# Altium PCB CH32X315MCU-R0-1v0.PcbDoc (part 1 of 2)
Units mil, origin at the board's own origin, x right, y up, seen from the top; angles counter-clockwise.
Board outline 2755.91 x 3228.35 mil, 4 copper layers (Top Layer, Layer 1, Layer 2, Bottom Layer), stack 23.756 mil thick; 75 components, 121 nets, 391 pads, 568 vias.
Unrouted connection lines stored in the file: 7.
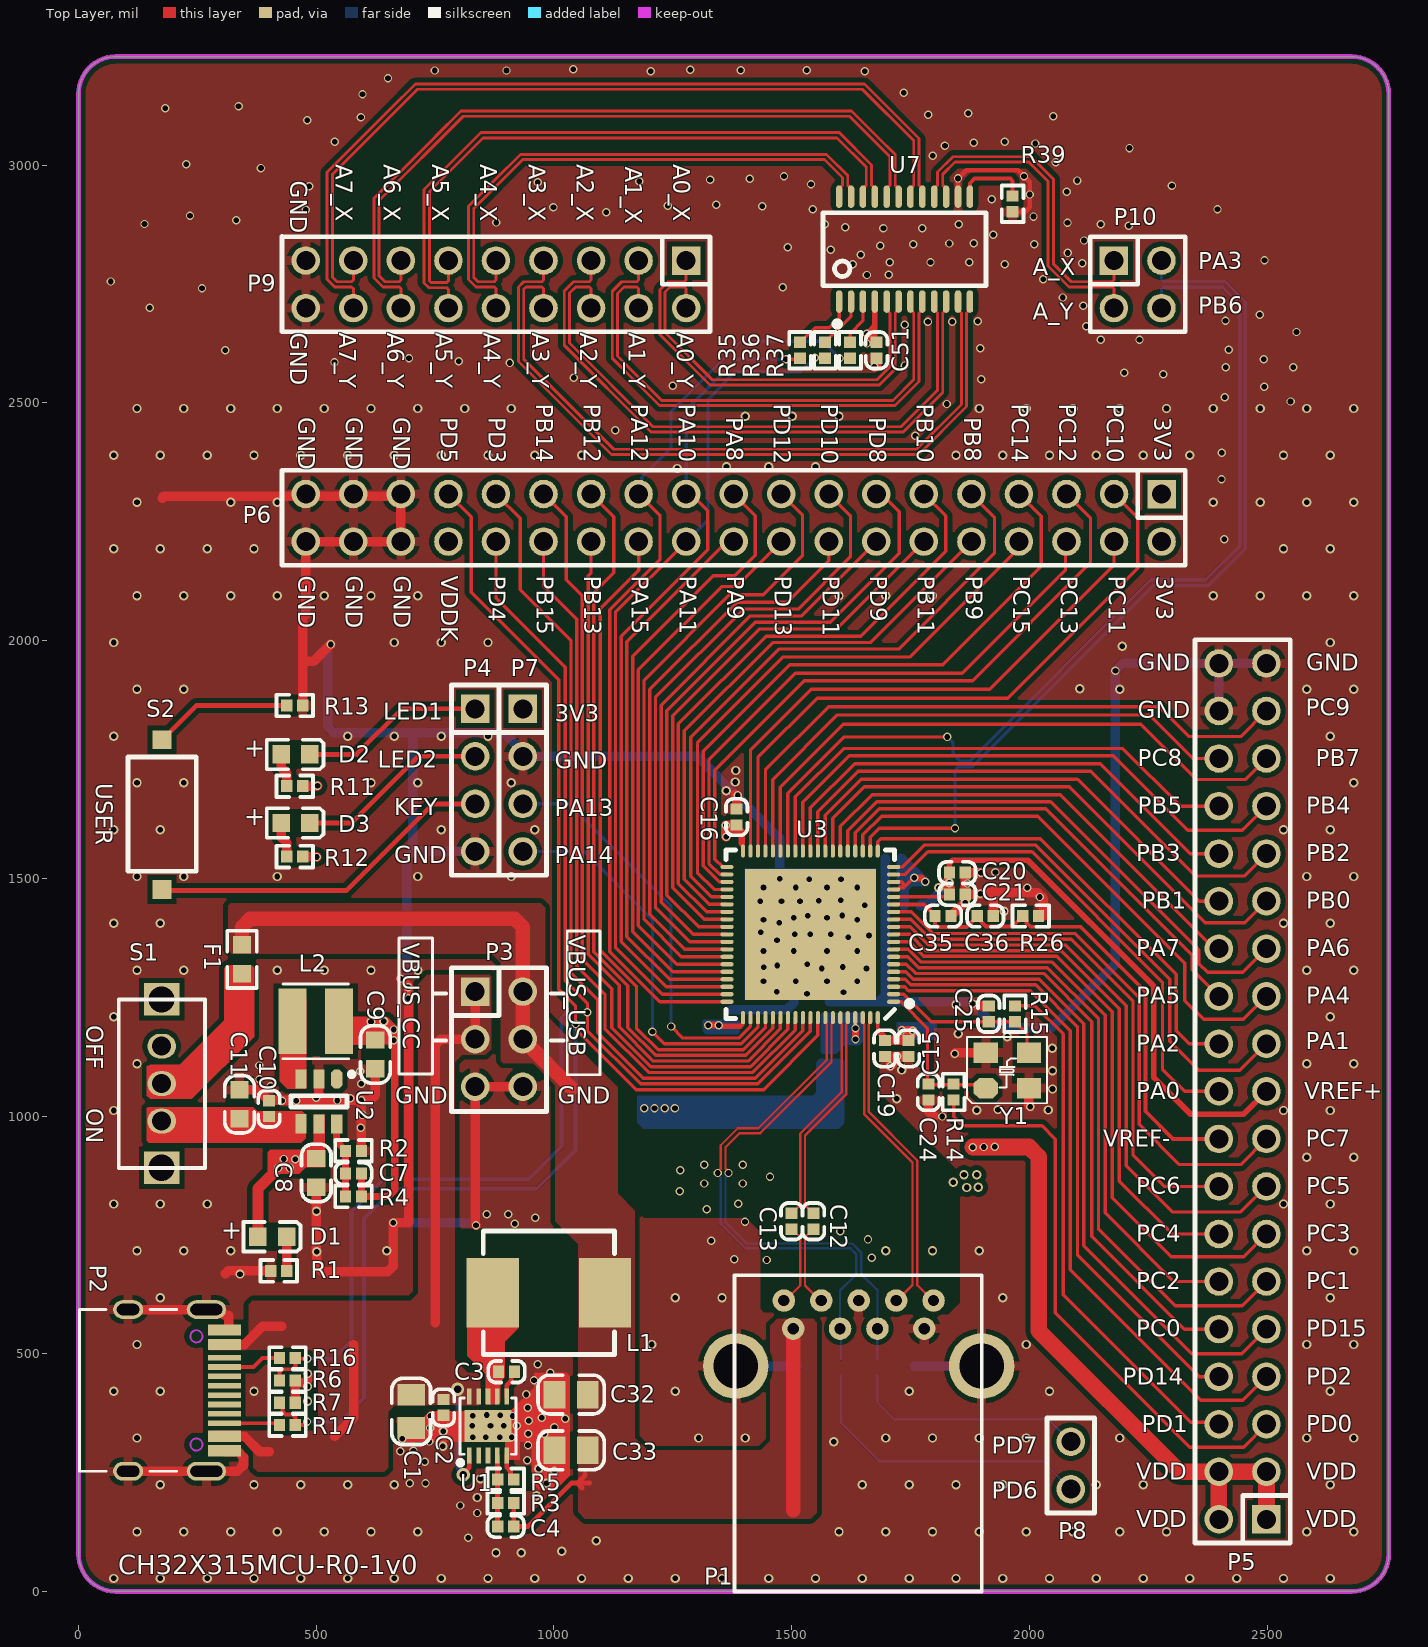
[diagram p0: Top Layer view]
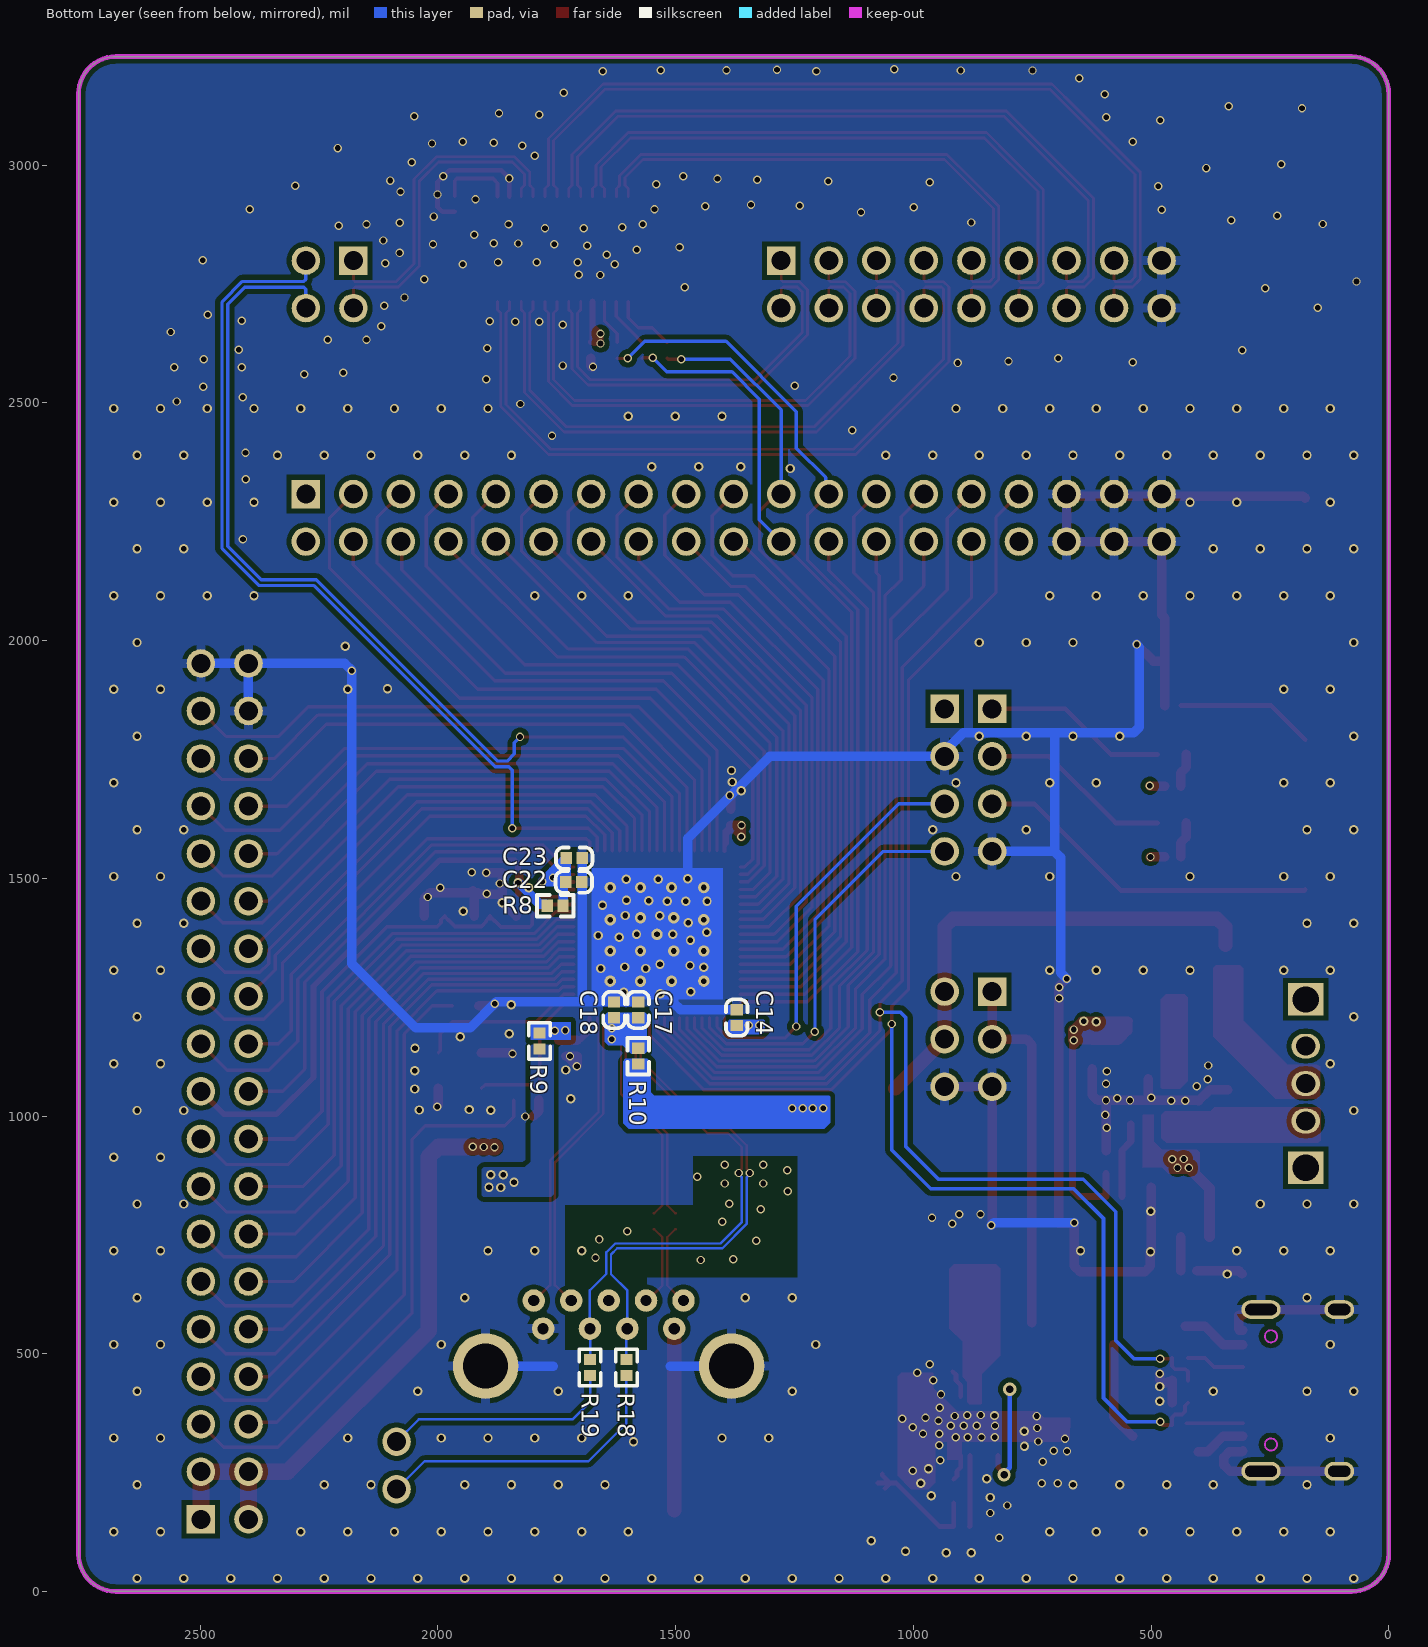
[diagram p1: Bottom Layer view, seen from below]
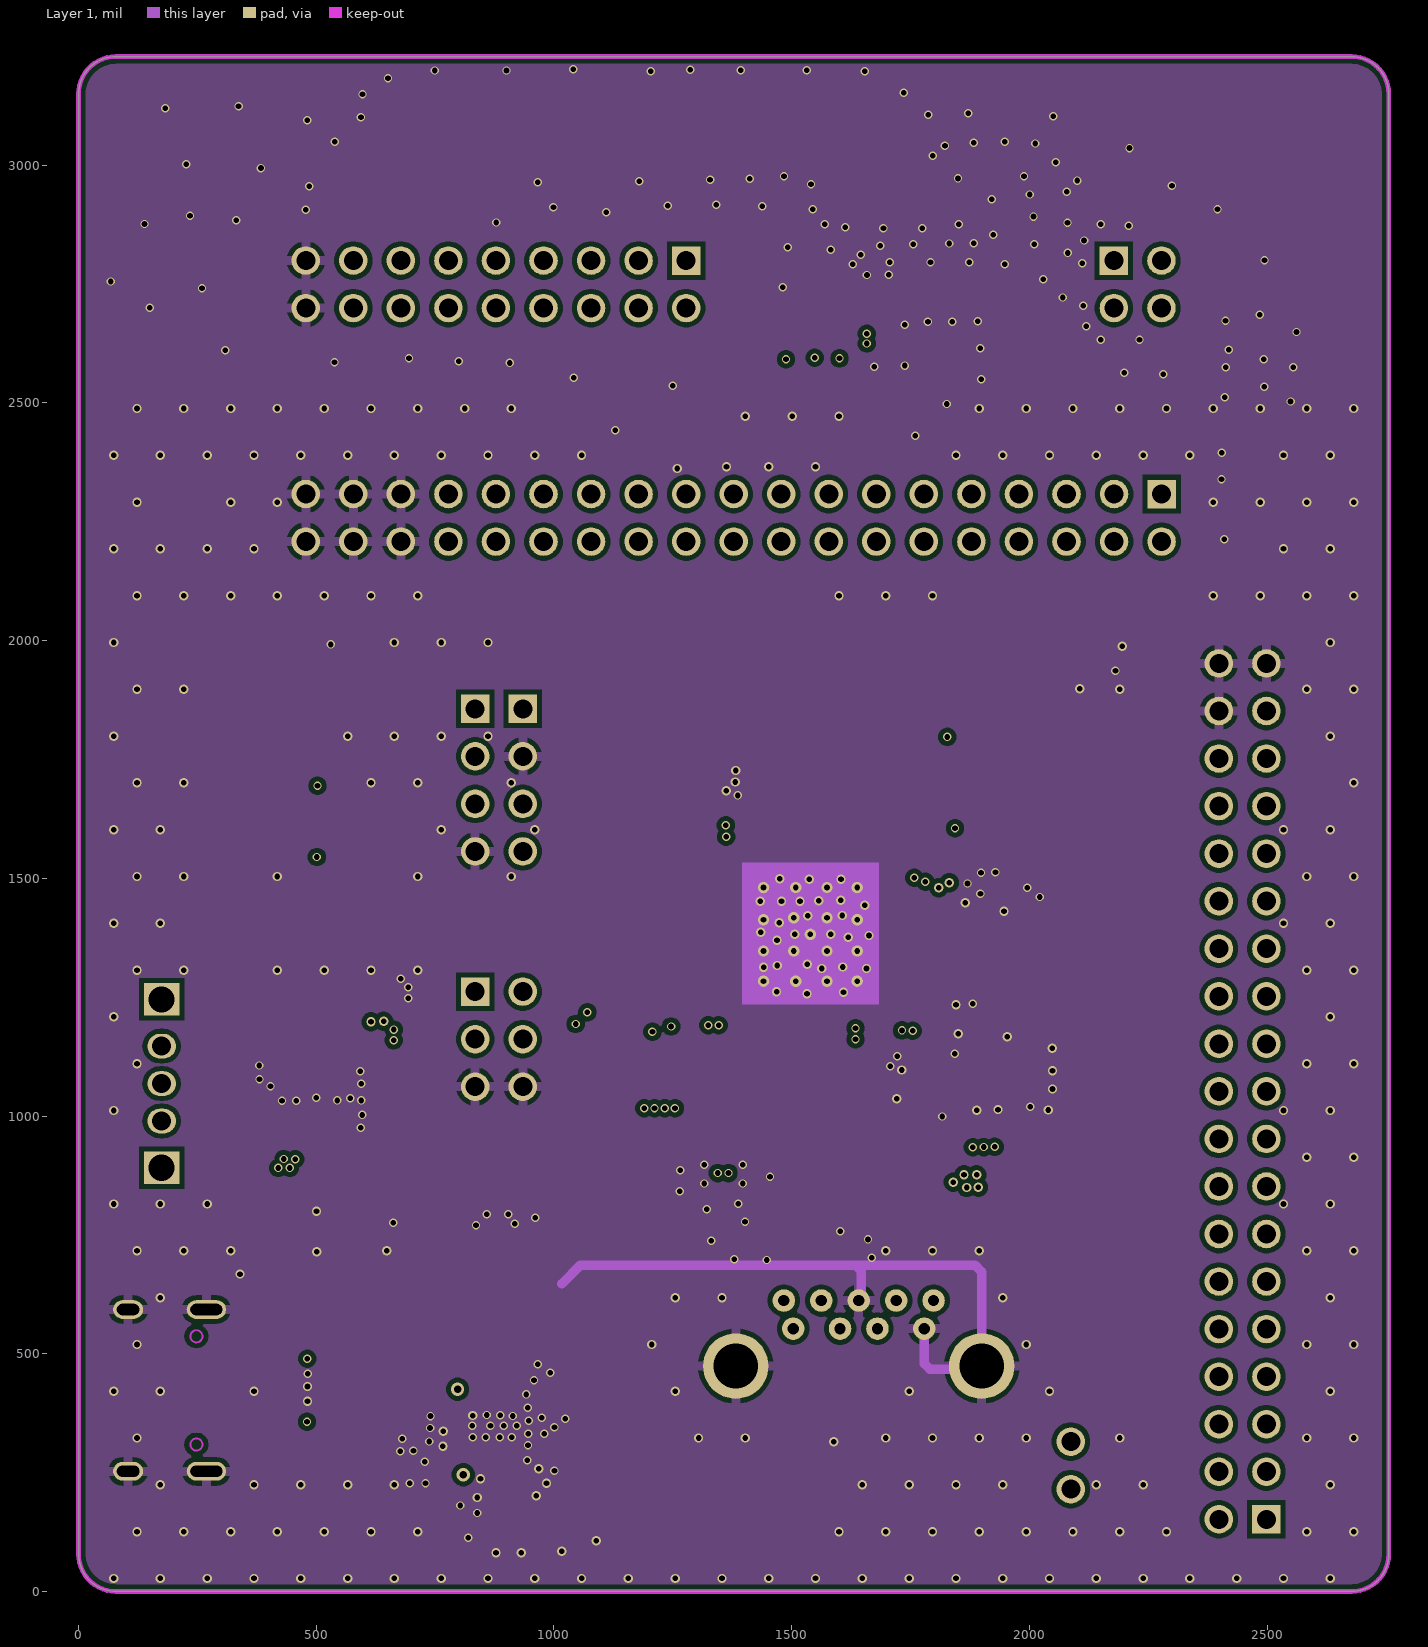
[diagram p2: Layer 1]
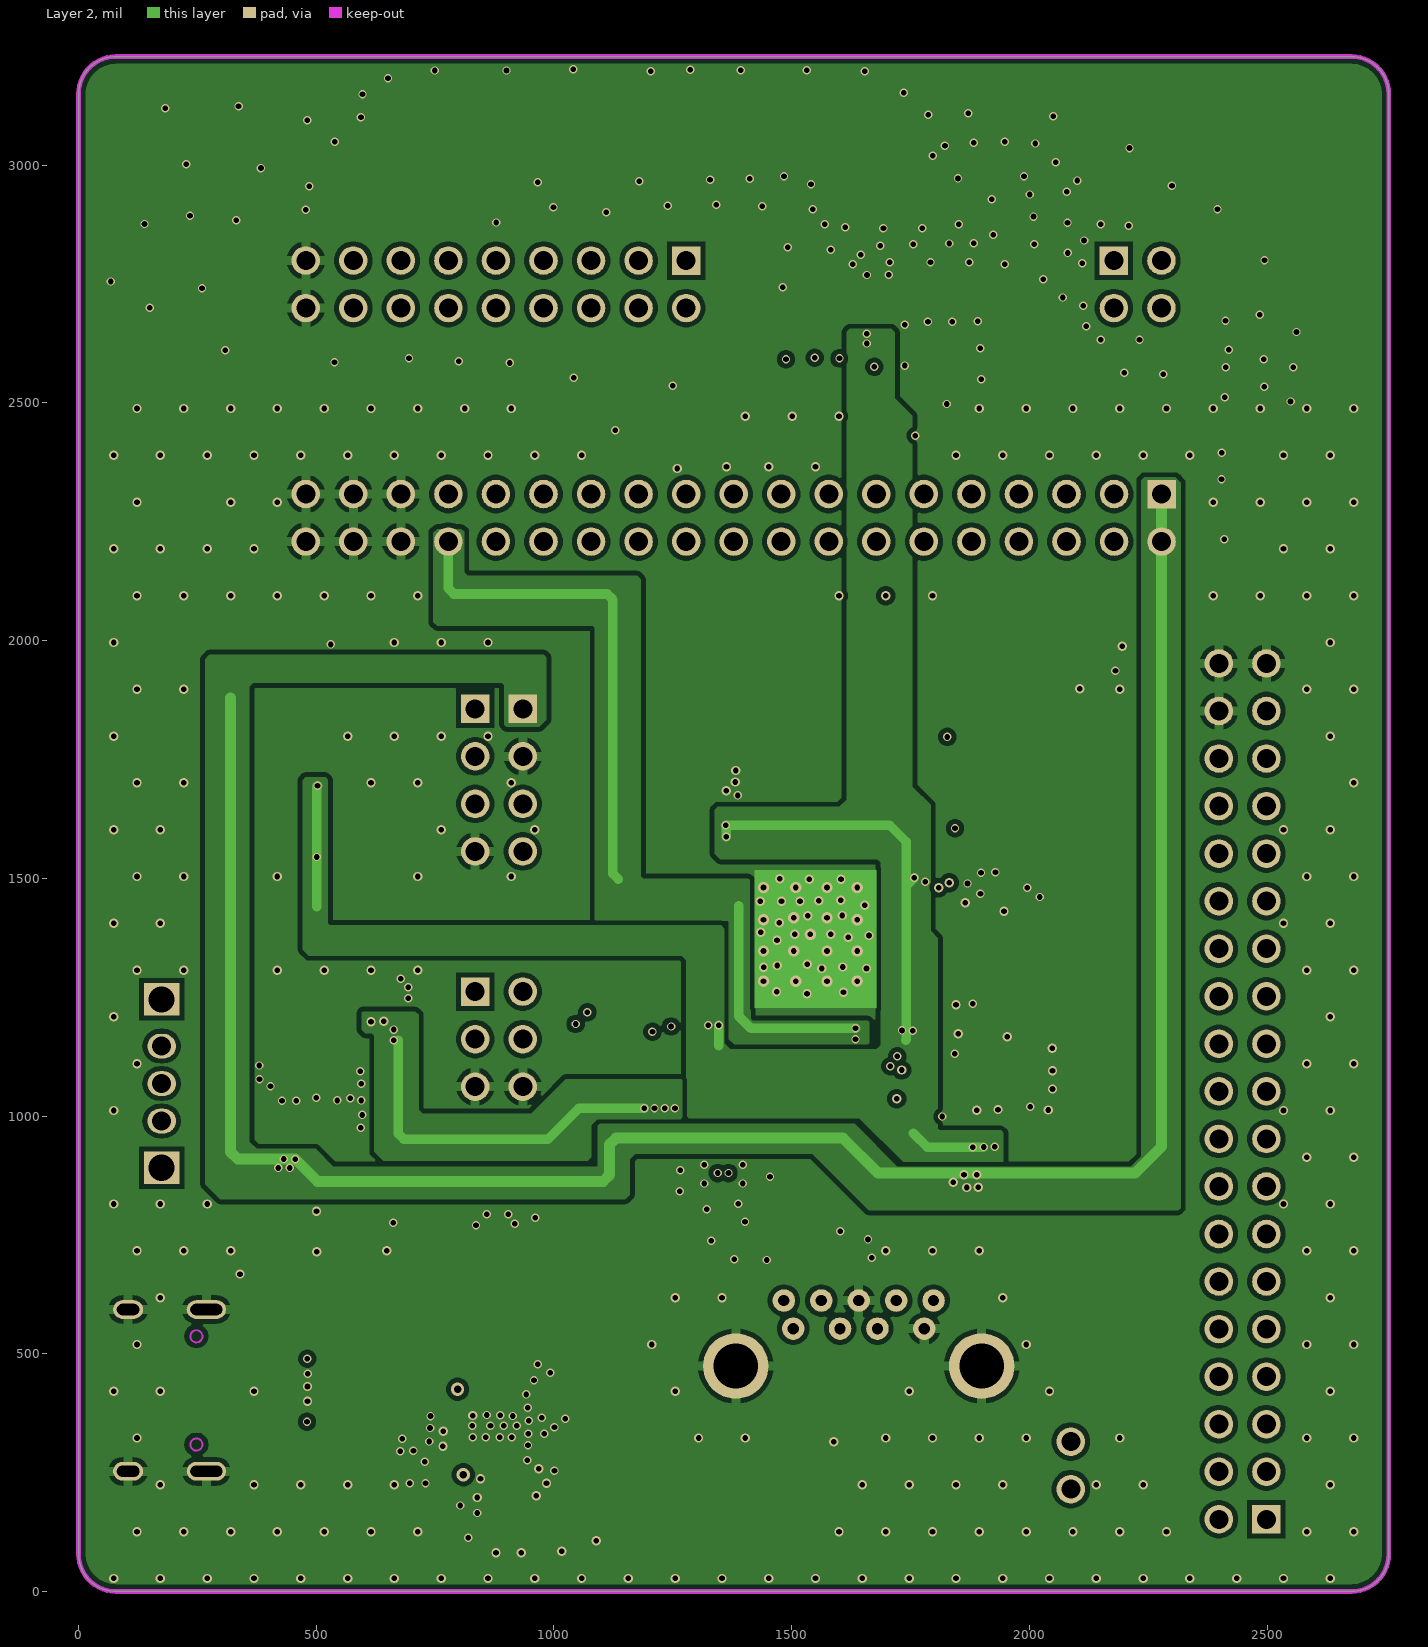
[diagram p3: Layer 2]

## Layer stack, top to bottom
Top Solder: solder mask 0.4, Solder Resist, Dk 3.5
Top Layer: signal copper 1.4
Dielectric 2: prepreg 2.8, PP-006, Dk 4.1
Layer 1: signal copper 1.378
Dielectric 1: dielectric 12.6, FR-4, Dk 4.8
Layer 2: signal copper 1.378
Dielectric 3: prepreg 2.8, PP-006, Dk 4.1
Bottom Layer: signal copper 1.4
Bottom Solder: solder mask 0.4, Solder Resist, Dk 3.5

## Board outline
0,78.74 0,3149.61 cw(c78.74,3149.61) 78.74,3228.35 2677.17,3228.35 cw(c2677.17,3149.61) 2755.91,3149.61 2755.91,78.74 cw(c2677.17,78.74) 2677.17,0 78.74,0 cw(c78.74,78.74)

## Design rules (kind name [scope] priority, off if disabled: settings)
Clearance Clearance_1 [InPolygon] p1: gap=10 ignorepadtopadclearanceinfootprint=FALSE
Clearance [All] p2: gap=5 ignorepadtopadclearanceinfootprint=FALSE except(6: Arc-THPad Arc-Via Track-THPad Track-Via Via-Fill Via-Poly Via-Region)
ComponentClearance [All] p1 off: gap=10 collisioncheckmode=3 verticalgap=10 showdistances=FALSE
DiffPairsRouting [All] p1: maxlimit=10 minlimit=5 mostfreqgap=8 toplayer_minwidth=4 toplayer_maxwidth=15 toplayer_prefwidth=8 midlayer1_minwidth=4 midlayer1_maxwidth=15 midlayer1_prefwidth=8 midlayer2_minwidth=4 midlayer2_maxwidth=15 midlayer2_prefwidth=8 bottomlayer_minwidth=4 bottomlayer_maxwidth=15 bottomlayer_prefwidth=8 maxuncoupledlength=500
HoleToHoleClearance [All] p1: gap=8 allowstackedmicrovias=TRUE
MinimumAnnularRing [All] p1: minimumring=2.76
MinimumSolderMaskSliver [All] p1 off: minsoldermaskwidth=10
PlaneConnect [All] p1: planeconnectstyle=Direct reliefexpansion=20 reliefentries=4 reliefconductorwidth=10 reliefairgap=10
PolygonConnect PolygonConnect_2 [InPolygonClass('New Class')] p1: connectstyle=Direct reliefconductorwidth=10 reliefentries=4 polygonreliefangle="90 Angle" airgapwidth=10
PolygonConnect PolygonConnect_1 [IsVia] p2: connectstyle=Direct reliefconductorwidth=10 reliefentries=4 polygonreliefangle="90 Angle" airgapwidth=10
PolygonConnect [All] p3: connectstyle=Relief reliefconductorwidth=20 reliefentries=4 polygonreliefangle="90 Angle" airgapwidth=10
RoutingVias [All] p1: holewidth=7.87 width=17.72 viastyle="Through Hole" minholewidth=5.91 minwidth=11.81 maxholewidth=28 maxwidth=50
SilkToSilkClearance [All] p1 off: silktosilkclearance=10
SilkToSolderMaskClearance [IsPad] p1 off: minsilkscreentomaskgap=10 clearancetoexposedcopper=TRUE
SolderMaskExpansion [All] p1: expansion=2 istentingtop=FALSE
Width [All] p1: maxlimit=196.85 minlimit=4 preferedwidth=5
23 further rules are at their usual default settings.

## Classes and differential pairs
polygon class "New Class": 1V2 3V3 5V VBUS_CC VDD VDDK
differential pair A7: +A7_Y -A7_X
differential pair A6: +A6_Y -A6_X
differential pair A5: +A5_Y -A5_X
differential pair A4: +A4_Y -A4_X
differential pair A3: +A3_Y -A3_X
differential pair A2: +A2_Y -A2_X
differential pair A1: +A1_X -A1_Y
differential pair A0: +A0_X -A0_Y
differential pair NewDifferentialPair2: +PA3 -PB6
differential pair A: +A_X -A_Y
differential pair PD6PD7: +USBHS_DM -USBHS_DP
differential pair SSRX: +SSRXA -SSRXB
differential pair SSTX: +SSTXA -SSTXB
differential pair NewDifferentialPair1: +NetC12_1 -NetC13_1

## Components (designator, comment, footprint, x,y, rotation, side; value= is the part's Value field where it differs from the comment)
C1 "NC(22uF/35V)" 0805_C 699.69,343.59 r90 top
C2 "NC(0.1uF)" 0402_C 767.54,370.43 r180 top
C3 "NC(100nF)" 0402_C 916.98,462.19 r270 top
C4 "NC(68pF)" 0402_C 915.2,136.81 r270 top
C7 "NC(4.7pF)" 0402_C 594.88,878.86 r270 top
C8 "10uF" 0603_C 500.13,849.96 r90 top
C9 "NC(10uF)" 0603_C 624.31,1099.16 r90 top
C10 "1uF" 0402_C 400.71,1032.25 r0 top
C11 "10uF" 0603_C 338.71,1054.93 r270 top
C12 "0.1uF" 0402_C 1545.85,761.86 r180 top
C13 "0.1uF" 0402_C 1499.85,761.86 r180 top
C14 "0.1uF" 0402_C 1371.5,1190.26 r0 bottom
C15 "4.7uF" 0402_C 1745.67,1158.89 r0 top
C16 "0.1uF" 0402_C 1384.21,1645.48 r0 top
C17 "2.2uF" 0402_C 1578.83,1206.46 r0 bottom
C18 "0.1uF" 0402_C 1629.73,1206.46 r0 bottom
C19 "0.1uF" 0402_C 1695.89,1158.89 r0 top
C20 "0.01uF" 0402_C 1831.61,1511.94 r90 top
C21 "1uF" 0402_C 1831.61,1466.13 r90 top
C22 "0.1uF" 0402_C 1731,1492.27 r90 bottom
C23 "0.1uF" 0402_C 1730.11,1542.33 r90 bottom
C24 "20pF" 0402_C 1787.67,1067.13 r0 top
C25 "20pF" 0402_C 1914.27,1198.18 r180 top
C32 "NC(22uF)" 0805_C 1000.96,414.14 r0 top
C33 "NC(22uF)" 0805_C 1000.96,296.9 r0 top
C35 "NC(0.01uF)" 0402_C 1801.61,1420.48 r90 top
C36 "NC(1uF)" 0402_C 1890.43,1420.48 r90 top
C51 "1uF" 0402_C 1678.57,2627.22 r0 top
D1 "RED" 0603+ 377.27,746.15 r0 top
D2 "BLUE" 0603+ 426.05,1760.53 r0 top
D3 "RED" 0603+ 426.05,1616.37 r0 top
F1 "1A" 0603 343.66,1359.79 r270 top
L1 "NC(4.7uH/5A)" IND-SMD_L7.0-W6.6 989.27,628.27 r0 top
L2 "NC(2.2uH)" CD32 499.04,1199.1 r0 top
P1 "USB3.0-A" USB3.0-A-Receptacle 1503.17,552.8 r0 top
P2 "TYPE-C" TYPE-C-Receptacle-2.0 307.04,422.88 r270 top
P3 "HEADER 3x2" IDC6-2.54mm 834.34,1261.66 r270 top
P4 "HEADER 4" SIP4-2.54mm 834.34,1856.48 r0 top
P5 "HEADER 19x2" IDC38-2.54MM 2498.45,151.84 r180 top
P6 "HEADER 19x2" IDC38-2.54MM 2277.95,2308.21 r270 top
P7 "HEADER 4" SIP4-2.54mm 934.34,1856.48 r0 top
P8 "HEADER 2" SIP2-2.54mm 2087.05,215.09 r0 top
P9 "HEADER 9x2" IDC18-2.54MM 1277.95,2799.25 r270 top
P10 "Header 2X2" IDC4-2.54mm 2177.69,2799.25 r0 top
R1 "1K" 0402 437.85,674.29 r180 top
R2 "NC(200k)" 0402 561.41,926.73 r0 top
R3 "NC(15k)" 0402 881.74,186.31 r0 top
R4 "NC(200k)" 0402 594.88,830.99 r180 top
R5 "NC(4.7k)" 0402 915.2,235.8 r180 top
R6 "NC(5.1K)" 0402 422.56,443.87 r0 top
R7 "NC(5.1K)" 0402 422.56,396.87 r0 top
R8 "0R" 0402 1736.77,1442.33 r0 bottom
R9 "0R" 0402 1786.44,1141.05 r90 bottom
R10 "NC(0R)" 0402 1578.83,1142.59 r270 bottom
R11 "1K" 0402 471.34,1693.78 r180 top
R12 "1K" 0402 471.34,1545.55 r180 top
R13 "10K" 0402 471.34,1863.32 r180 top
R14 "NC(0Ω)" 0402 1840.52,1033.67 r90 top
R15 "NC(0Ω)" 0402 1969.53,1231.65 r270 top
R16 "NC(0Ω)" 0402 422.56,490.87 r0 top
R17 "NC(0Ω)" 0402 422.56,349.87 r0 top
R18 "NC(0Ω)" 0402 1603.63,487.87 r270 bottom
R19 "NC(0Ω)" 0402 1679.94,487.87 r270 bottom
R26 "0R" 0402 2019.23,1420.48 r180 top
R35 "NC(0Ω)" 0402 1517.47,2627.22 r270 top
R36 "NC(0Ω)" 0402 1570.17,2627.22 r270 top
R37 "NC(0Ω)" 0402 1622.87,2627.22 r270 top
R39 "0Ω" 0402 1964.62,2901.77 r90 top
S1 "SW SPDT" SW1 174.75,1068.18 r90 top
S2 "KEY" SMD_6.1x3.65x2.5mm-KEY 175.65,1476.46 r90 top
U1 "NC(CH2024Q)" DFN10_3X3 861.16,347.74 r0 top
U2 "CH2003K" SOT-23-6 542.95,1077.88 r180 top
U3 "CH32X315MCU" QFN76_9X9 1539.19,1382.09 r90 top
U7 "CH448U" QSOP24 1599.76,2712.97 r0 top
Y1 "20M" XT3225 1908.41,1058.44 r0 top

## Footprints (in the part's own frame and the unit in brackets; to place one, negate y for a bottom-side part, rotate by r counter-clockwise, add the part's x,y. Pads: shape width x height; smd on the part's side, far side on the other; paste and mask are expansions set on the pad)
0402 [mm]
  rect 0.6x0.65 smd mask+0.051: 1(0,0) 2(0.85,0)
  silkscreen extent -0.55,-0.58 1.4,0.57
0402_C [mm]
  rect 0.65x0.6 smd mask+0.051: 1(0,0) 2(0,-0.85)
  silkscreen extent -0.58,-1.4 0.57,0.55
0603 [mm]
  rect 0.93x0.98 smd: 1(0,0) 2(1.54,0)
  silkscreen extent -0.76,-0.79 2.3,0.79
0603+ [mm]
  rect 0.93x0.98 smd: 1(0,0) 2(1.54,0)
  silkscreen extent -0.76,-0.79 2.27,0.79
0603_C [mm]
  rect 0.93x0.98 smd mask+0.051: 1(0,0) 2(1.54,0)
  silkscreen extent -0.76,-0.79 2.31,0.79
0805_C [mm]
  rect 1.16x1.47 smd mask+0.051: 1(0,0) 2(1.78,0)
  silkscreen extent -0.88,-1.04 2.66,1.03
CD32 [mm]
  rect 1.5x3.5 smd: 1(-1.25,0) 2(1.25,0)
  silkscreen extent -1.75,-2 1.75,2
DFN10_3X3 [mm]
  rect 2.5x1.7 smd mask+0.051: 0(0,0)
  rect 0.25x0.85 smd mask+0.051: 1(-1,-1.575) 2(-0.5,-1.575) 3(0,-1.575) 4(0.5,-1.575) 5(1,-1.575) 6(1,1.575) 7(0.5,1.575) 8(0,1.575) 9(-0.5,1.575) 10(-1,1.575)
  silkscreen extent -1.57,-2.05 1.5,1.5
IDC4-2.54mm [mil]
  rect 60x60 hole 40: 1(0,0)
  round 60 hole 40: 2(100,0) 3(0,-100) 4(100,-100)
  silkscreen extent -50,-150 150,50
IDC6-2.54mm [mil]
  rect 60x60 hole 40: 1(0,0)
  round 60 hole 40: 2(0,100) 3(100,0) 4(100,100) 5(200,0) 6(200,100)
  silkscreen extent -50,-50 252,150
IDC18-2.54MM [mil]
  rect 60x60 hole 40: 1(0,0)
  round 60 hole 40: 2(100,0) 3(0,-100) 4(100,-100) 5(0,-200) 6(100,-200) 7(0,-300) 8(100,-300) 9(0,-400) 10(100,-400) 11(0,-500) 12(100,-500) 13(0,-600) 14(100,-600) 15(0,-700) 16(100,-700) 17(0,-800) 18(100,-800)
  silkscreen extent -51,-850 150,50
IDC38-2.54MM [mil]
  rect 60x60 hole 40: 1(0,0)
  round 60 hole 40: 2(100,0) 3(0,-100) 4(100,-100) 5(0,-200) 6(100,-200) 7(0,-300) 8(100,-300) 9(0,-400) 10(100,-400) 11(0,-500) 12(100,-500) 13(0,-600) 14(100,-600) 15(0,-700) 16(100,-700) 17(0,-800) 18(100,-800) 19(0,-900) 20(100,-900) 21(0,-1000) 22(100,-1000) 23(0,-1100) 24(100,-1100) 25(0,-1200) 26(100,-1200) 27(0,-1300) 28(100,-1300) 29(0,-1400) 30(100,-1400) 31(0,-1500) 32(100,-1500) 33(0,-1600) 34(100,-1600) 35(0,-1700) 36(100,-1700) 37(0,-1800) 38(100,-1800)
  silkscreen extent -50,-1850 150,50
IND-SMD_L7.0-W6.6 [mm]
  rect 2.8x3.7 smd: 1(-3,0) 2(3,0)
  silkscreen extent -3.5,-3.3 3.5,3.3
QFN76_9X9 [mm]
  round 0.61 hole 0.305 mask+0.051: 0(-2.5,-2.5) 0(-2.5,2.5) 0(0,0) 0(2.5,-2.5) 0(2.5,2.5)
  rect 7x7 smd mask+0.051: 0(0,0)
  oval 0.22x0.7 smd mask+0.051: 1(-3.6,-4.45) 2(-3.2,-4.45) 3(-2.8,-4.45) 4(-2.4,-4.45) 5(-2,-4.45) 6(-1.6,-4.45) 7(-1.2,-4.45) 8(-0.8,-4.45) 9(-0.4,-4.45) 10(0,-4.45) 11(0.4,-4.45) 12(0.8,-4.45) 13(1.2,-4.45) 14(1.6,-4.45) 15(2,-4.45) 16(2.4,-4.45) 17(2.8,-4.45) 18(3.2,-4.45) 19(3.6,-4.45) 39(3.6,4.45) 40(3.2,4.45) 41(2.8,4.45) 42(2.4,4.45) 43(2,4.45) 44(1.6,4.45) 45(1.2,4.45) 46(0.8,4.45) 47(0.4,4.45) 48(0,4.45) 49(-0.4,4.45) 50(-0.8,4.45) 51(-1.2,4.45) 52(-1.6,4.45) 53(-2,4.45) 54(-2.4,4.45) 55(-2.8,4.45) 56(-3.2,4.45) 57(-3.6,4.45)
  oval 0.7x0.22 smd mask+0.051: 20(4.45,-3.6) 21(4.45,-3.2) 22(4.45,-2.8) 23(4.45,-2.4) 24(4.45,-2) 25(4.45,-1.6) 26(4.45,-1.2) 27(4.45,-0.8) 28(4.45,-0.4) 29(4.45,0) 30(4.45,0.4) 31(4.45,0.8) 32(4.45,1.2) 33(4.45,1.6) 34(4.45,2) 35(4.45,2.4) 36(4.45,2.8) 37(4.45,3.2) 38(4.45,3.6) 58(-4.45,3.6) 59(-4.45,3.2) 60(-4.45,2.8) 61(-4.45,2.4) 62(-4.45,2) 63(-4.45,1.6) 64(-4.45,1.2) 65(-4.45,0.8) 66(-4.45,0.4) 67(-4.45,0) 68(-4.45,-0.4) 69(-4.45,-0.8) 70(-4.45,-1.2) 71(-4.45,-1.6) 72(-4.45,-2) 73(-4.45,-2.4) 74(-4.45,-2.8) 75(-4.45,-3.2) 76(-4.45,-3.6)
  silkscreen extent -4.5,-5.45 4.5,4.5
QSOP24 [mm]
  oval 0.35x1.2 smd mask+0.051: 1(0,0) 2(0.635,0) 3(1.27,0) 4(1.905,0) 5(2.54,0) 6(3.175,0) 7(3.81,0) 8(4.445,0) 9(5.08,0) 10(5.715,0) 11(6.35,0) 12(6.985,0) 13(6.985,5.6) 14(6.35,5.6) 15(5.715,5.6) 16(5.08,5.6) 17(4.445,5.6) 18(3.81,5.6) 19(3.175,5.6) 20(2.54,5.6) 21(1.905,5.6) 22(1.27,5.6) 23(0.635,5.6) 24(0,5.6)
  silkscreen extent -0.86,-1.35 7.84,4.75
SIP2-2.54mm [mil]
  round 60 hole 40: 1(0,0) 2(0,100)
  silkscreen extent -50,-50 50,150
SIP4-2.54mm [mil]
  rect 60x60 hole 40: 1(0,0)
  round 60 hole 40: 2(0,-100) 3(0,-200) 4(0,-300)
  silkscreen extent -50,-350 50,50
SMD_6.1x3.65x2.5mm-KEY [mm]
  rect 1x1 smd: 1(0,0) 2(8,0)
  silkscreen extent 0.98,-1.83 7.08,1.83
SOT-23-6 [mm] "SOT-23-6"
  oct 0.6x1 smd: 1(0,0)
  rect 0.6x1 smd: 2(0.95,0) 3(1.9,0) 5(0.95,2.4) 6(0,2.4)
  rect 0.6x1.04 smd: 4(1.9,2.4)
  silkscreen extent -0.93,-0.38 2.45,1.49
SW1 [mm]
  rect 1.75x1.9 hole 1.4: 0(-4.5,0) 0(4.5,0)
  oval 1.321x1.524 hole 1.016: 1(0,0) 2(-2,0) 3(2,0)
  silkscreen extent -4.51,-2.31 4.5,2.29
TYPE-C-Receptacle-2.0 [mm]
  oval 1x2.1 hole 0.6 slot 1.7 at 90 deg: 0(-4.32,-0.97) 0(4.32,-0.97)
  oval 1x1.6 hole 0.6 slot 1.2 at 90 deg: 0(-4.32,-5.15) 0(4.32,-5.15)
  rect 0.6x1.75 smd mask+0.051: A1(-3.225,0) A4(-2.45,0) B1(3.225,0) B4(2.45,0)
  rect 0.3x1.75 smd mask+0.051: A5(-1.25,0) A6(-0.25,0) A7(0.25,0) A8(1.25,0) B5(1.75,0) B6(0.75,0) B7(-0.75,0) B8(-1.75,0)
  Keep-Out Layer circle w0.1: c-2.89,-1.5 r0.325
  Keep-Out Layer circle w0.1: c2.89,-1.5 r0.325
  silkscreen extent -4.32,-7.75 4.32,-2.55
USB3.0-A-Receptacle [mm]
  round 3.5 hole 2.4: 0(-3.07,-2) 0(10.07,-2)
  round 1.2 hole 0.6: 1(0,0) 2(2.5,0) 3(4.5,0) 4(7,0) 5(7.5,1.5) 6(5.5,1.5) 7(3.5,1.5) 8(1.5,1.5) 9(-0.5,1.5)
  silkscreen extent -3.14,-14.04 10.07,2.85
XT3225 [mm]
  oct 1.3x1.1 smd: 1(0,0)
  rect 1.3x1.1 smd: 2(2.3,0) 3(2.3,1.9) 4(0,1.9)
  silkscreen extent -1.02,-0.8 3.27,2.74

## Part data
C1 C4 C32 C33: library part "0603 100nF (104) 10% 50V", "贴片电容", Package=0603, SuppliersPartNumber=C14663, ComponentLink1Description=供应商链接, ComponentLink1URL=http://www.szlcsc.com/product/details_15331.html, Supplier=LC
C2 C7 C8 C9 C10 C11 C12 C13 C14 C15 C16 C17 C18 C19 C20 C21 C22 C23 C35 C36 C51: library part CAP, "Capacitor"
C3: library part "0603 1uF (105) 10% 50V", "贴片电容", Package=0603, SuppliersPartNumber=C15849, ComponentLink1Description=供应商链接, ComponentLink1URL=http://www.szlcsc.com/product/details_16531.html, Supplier=LC
C24 C25: library part Cap, "Capacitor"
D1 D2 D3: library part LED0, "Typical INFRARED GaAs LED", LatestRevisionDate=08-Jul-2005, LatestRevisionNote="Mech Layer 1 removed.", PackageDescription="LED; 2 Leads", PackageReference=LED-0, Published=8-Jun-2000, Publisher="Altium Limited"
F1: library part FUSE1, "Fuse"
L1 L2: library part INDUCTOR
P2: library part TYPE-C1
P3: "Header, 3-Pin, Dual row"
P4 P7: "Header, 4-Pin"
P5 P6: "Header, 19-Pin, Dual row"
P8: "Header, 2-Pin"
P9: "Header, 9-Pin, Dual row"
P10: "Header, 2-Pin, Dual row", LatestRevisionDate=17-Jul-2002, LatestRevisionNote="Re-released for DXP Platform.", Publisher="Altium Limited"
R1 R2 R3 R4 R5 R11 R12 R13 R14 R15 R35 R36 R37 R39: library part RES
R6 R7 R16 R17 R18 R19: library part Res2, "Resistor"
R8 R9 R10 R26: library part R
S2: library part KEY1
U1: library part CH2024Q, "Step-Down DC-DC Converter, 28V input, FB 1.2V, 3A output"
U2: "Step-Down DC-DC Converter, 5V input, FB 0.6V, 800mA output, with LDO 3.3V * 200mA"
U3: "RISC-V FPU MCU, 480MHz, USB3.0_5Gbps, PD, HSADC"
U7: "USB2.0 mux 8:1 / 16:1 Differential Switch, DPOT with dual enable"
Y1: library part XTAL, "Crystal Oscillator", LatestRevisionDate=17-Jul-2002, LatestRevisionNote="Re-released for DXP Platform.", PackageReference=R38, Published=8-Jun-2000, Publisher="Altium Limited"

## Via types
v1: diameter 19.68, hole 11.81, Top Layer to Bottom Layer, tented both sides, 297 vias
v2: diameter 17.72, hole 11.81, Top Layer to Bottom Layer, tented both sides, 257 vias
v3: diameter 23.62, hole 11.81, Top Layer to Bottom Layer, tented both sides, 8 vias
v4: diameter 23.62, hole 11.81, Top Layer to Bottom Layer, 4 vias
v5: diameter 27.56, hole 15.75, Top Layer to Bottom Layer, tented both sides, 2 vias

## Nets (pads, with @x,y where several pads share a name; then routed paths per layer and width w, separated by ;. In a path a pad name is that pad's centre, name@x,y a point inside that pad or via, vN(x,y) a via of type N, cw(c..) or ccw(c..) an arc to the next point about the centre after c; other vN are vias at no path point)
1V2: C7.1 C9.2 L2.2 R4.1 R10.2 | length 2191.3
  Top Layer w15: C7.1@594.88,878.86 R4.1@594.88,830.99 651.22,830.99 665.21,844.97 665.21,1144.46 ; v2@657.67,1152.01 665.21,1144.46 ; v2@664.69,1159.03 665.21,1158.51 665.21,1144.46
  Top Layer w20: L2.2@548.26,1199.1 L2.2@549.26,1199.1 ; C9.2@625.31,1159.79 C9.2@624.31,1159.79 568.78,1159.79 549.26,1179.32 L2.2@549.26,1189.96 ; C9.2@629.66,1159.95 663.77,1159.95 664.69,1159.03 664.69,1170.44 ; L2.2@549.26,1189.96 L2.2@549.26,1199.1 ; L2.2@549.26,1189.96 568.78,1170.44 664.69,1170.44 ; L2.2@549.26,1199.1 645.43,1199.1 v2(662.69,1181.84) ; L2.2@549.26,1199.1 566.51,1181.84 v2(662.69,1181.84) ; v2(662.69,1181.84) 664.69,1181.84 664.69,1170.44
  Layer 2 w20: 672.69,1159.03 672.69,962.81 684.41,951.1 987.26,951.1 1052.36,1016.19 v2@1189.84,1016.19
  Bottom Layer w20: v2@1189.84,1016.19 1553.98,1016.19 1578.83,1041.05 R10.2@1578.83,1109.12
  other v1: 615.2,1197.91 641.62,1198.99
  other v2: 1189.84,1016.49 1211.37,1016.49 1232.9,1016.49 1254.43,1016.49 662.69,1159.03
3V3: C8.2 D1.1 P6.1 P6.2 P7.1 R9.1 U2.5 | length 4726.7
  Top Layer w23: D1.1@377.27,746.15 377.27,847.64 v2(420.4,890.77) ; v2(455.76,909.19) 498.74,909.19 C8.2@500.13,910.59 ; C8.2@505.55,903.55 U2.5@505.55,983.39
  Layer 2 w23: 319.48,1878.91 319.48,924.54 334.83,909.19 431.69,909.19 v2(455.76,909.19) 502.28,862.67 1103.58,862.67 1117.05,876.15 1117.05,939.83 1130.53,953.3 1608.21,953.3 1681.53,879.98 2222.46,879.98 2277.95,935.47 P6.2@2277.95,2208.21 P6.1@2277.95,2308.21
  other v1: 1868.07,849.55 1892.61,850.03 1839.95,860.99 1862.35,876.24 1888.8,876.24
  other v2: 444.48,890.77 431.69,909.57
+5V: C10.2 C11.2 S1.2 U2.4 | length 281.2
  Top Layer w30: S1.2@174.75,989.44 332.86,989.44 334.42,990.99 C11.2@338.71,990.99 ; C11.2@338.71,983.62 455.31,983.62
A0_X: P9.1 U7.6 | length 896.4
  Top Layer w6: P9.1@1277.95,2799.25 1277.95,2758.27 1274.44,2754.75 1239.58,2754.75 1222.81,2737.99 1222.81,2643.26 1328.38,2537.69 1409.6,2537.69 1684.16,2537.69 1717.76,2571.29 1717.76,2688.83 1724.76,2695.83 U7.6@1724.76,2712.97
A0_Y: P9.2 U7.5 | length 841.7
  Top Layer w6: P9.2@1277.95,2699.25 1277.95,2740.24 1274.44,2743.75 1244.13,2743.75 1233.81,2733.43 1233.81,2647.82 1332.94,2548.69 1679.61,2548.69 1706.76,2575.84 1706.76,2688.83 1699.76,2695.83 U7.5@1699.76,2712.97
A1_X: P9.3 U7.8 | length 1126
  Top Layer w6: P9.3@1177.95,2799.25 1177.95,2758.27 1174.44,2754.75 1142.52,2754.75 1122.51,2734.74 1122.51,2593.63 1163.1,2553.03 1222.01,2494.13 1336.77,2494.13 1717.37,2494.13 1767.76,2544.52 1767.76,2688.83 1774.76,2695.83 U7.8@1774.76,2712.97
A1_Y: P9.4 U7.7 | length 1071.3
  Top Layer w6: P9.4@1177.95,2699.25 1177.95,2740.24 1174.44,2743.75 1147.08,2743.75 1133.51,2730.18 1133.51,2598.18 1174.62,2557.07 1226.56,2505.13 1712.81,2505.13 1756.76,2549.07 1756.76,2688.83 1749.76,2695.83 U7.7@1749.76,2712.97
A2_X: P9.5 U7.10 | length 1321.1
  Top Layer w6: P9.5@1077.95,2799.25 1077.95,2758.27 1074.44,2754.75 1041.21,2754.75 1021.67,2735.21 1021.67,2621.01 1203.94,2438.74 1734.73,2438.74 1817.76,2521.77 1817.76,2688.83 1824.76,2695.83 U7.10@1824.76,2712.97
A2_Y: P9.6 U7.9 | length 1266.4
  Top Layer w6: P9.6@1077.95,2699.25 1077.95,2740.24 1074.44,2743.75 1045.76,2743.75 1032.67,2730.66 1032.67,2625.57 1208.49,2449.74 1730.17,2449.74 1806.76,2526.33 1806.76,2688.83 1799.76,2695.83 U7.9@1799.76,2712.97
A3_X: P9.7 U7.12 | length 1545.1
  Top Layer w6: P9.7@977.95,2799.25 977.95,2758.27 974.44,2754.75 936.33,2754.75 925.37,2743.8 925.37,2587.24 1121.13,2391.49 1767.26,2391.49 1867.76,2491.99 1867.76,2688.83 1874.76,2695.83 U7.12@1874.76,2712.97
A3_Y: P9.8 U7.11 | length 1490.4
  Top Layer w6: P9.8@977.95,2699.25 977.95,2740.24 974.44,2743.75 940.88,2743.75 936.37,2739.24 936.37,2591.8 1125.69,2402.49 1762.7,2402.49 1856.76,2496.54 1856.76,2688.83 1849.76,2695.83 U7.11@1849.76,2712.97
A4_X: P9.9 U7.24 | length 1114.8
  Top Layer w6: P9.9@877.95,2799.25 877.95,2758.27 874.44,2754.75 840.25,2754.75 831.33,2763.67 831.33,2908.75 934.23,3011.64 1568.82,3011.64 1606.76,2973.71 1606.76,2957.58 1599.76,2950.58 U7.24@1599.76,2933.44
A4_Y: P9.10 U7.23 | length 1174
  Top Layer w6: 876.45,2969.42 929.67,3022.64 1573.38,3022.64 1617.76,2978.27 1617.76,2957.58 1624.76,2950.58 U7.23@1624.76,2933.44 ; P9.10@877.95,2699.25 877.95,2740.24 874.44,2743.75 835.7,2743.75 820.33,2759.12 820.33,2913.3 879.67,2972.64
A5_X: P9.11 U7.22 | length 1329.7
  Top Layer w6: P9.11@777.95,2799.25 777.95,2756.6 774.44,2753.08 741.43,2753.08 737.91,2756.6 737.91,2944.34 850.83,3057.26 1595.32,3057.26 1656.76,2995.82 1656.76,2957.58 1649.76,2950.58 U7.22@1649.76,2933.44
A5_Y: P9.12 U7.21 | length 1385.6
  Top Layer w6: P9.12@777.95,2699.25 777.95,2738.57 774.44,2742.08 736.87,2742.08 726.91,2752.04 726.91,2948.89 796.28,3018.26 ; 793.06,3015.04 846.28,3068.26 1599.87,3068.26 1667.76,3000.38 1667.76,2957.58 1674.76,2950.58 U7.21@1674.76,2933.44
A6_X: P9.13 U7.20 | length 1522.4
  Top Layer w6: P9.13@677.95,2799.25 677.95,2758.27 674.44,2754.75 644.65,2754.75 632.09,2767.31 632.09,2925.73 809.24,3102.88 1621.54,3102.88 1706.76,3017.65 1706.76,2957.58 1699.76,2950.58 U7.20@1699.76,2933.44
A6_Y: P9.14 U7.19 | length 1581.6
  Top Layer w6: P9.14@677.95,2699.25 677.95,2740.24 674.44,2743.75 640.1,2743.75 621.09,2762.76 621.09,2930.28 754.68,3063.88 ; 751.46,3060.65 804.68,3113.88 1626.09,3113.88 1697.55,3042.41 1701.3,3038.67 1717.76,3022.21 1717.76,2957.58 1724.76,2950.58 U7.19@1724.76,2933.44
A7_X: P9.15 U7.18 | length 1769.6
  Top Layer w6: P9.15@577.95,2799.25 577.95,2758.27 574.44,2754.75 543.38,2754.75 533.79,2764.34 533.79,2980.47 713,3159.67 1648.5,3159.67 1756.76,3051.42 1756.76,2957.58 1749.76,2950.58 U7.18@1749.76,2933.44
A7_Y: P9.16 U7.17 | length 1828.8
  Top Layer w6: P9.16@577.95,2699.25 577.95,2740.24 574.44,2743.75 538.82,2743.75 522.79,2759.78 522.79,2985.03 658.44,3120.67 ; 655.22,3117.45 708.44,3170.67 1653.06,3170.67 1767.76,3055.98 1767.76,2957.58 1774.76,2950.58 U7.17@1774.76,2933.44
A_X: P10.1 U7.16 | length 694.6
  Top Layer w6: U7.16@1799.76,2933.44 1799.76,2950.58 1806.76,2957.58 1806.76,2985.2 1839.17,3017.61 2003.14,3017.61 2050.23,2970.52 2050.23,2792.48 2087.96,2754.75 2174.18,2754.75 2177.69,2758.27 P10.1@2177.69,2799.25
A_Y: P10.3 U7.15 | length 676.4
  Top Layer w6: U7.15@1824.76,2933.44 1824.76,2950.58 1817.76,2957.58 1817.76,2980.64 1843.73,3006.61 1998.58,3006.61 2039.23,2965.96 2039.23,2787.93 2083.41,2743.75 2174.18,2743.75 2177.69,2740.24 P10.3@2177.69,2699.25
CC1: P6.30 R6.1 R16.2 U3.67 | length 3006.3
  Top Layer w7: P6.30@877.95,2208.21 877.95,2089.74 1023.72,1943.97 1023.72,1284.23 1070.33,1237.62 1070.33,1179.76 1182.57,1067.52 1428.27,1067.52 1539.19,1178.44 U3.67@1539.19,1206.9
  Top Layer w8: R6.1@422.56,443.87 422.56,462.8 427.24,467.49 449.91,467.49 456.02,473.6 R16.2@456.02,490.87 457.44,489.45 v2(481.19,489.45)
  Bottom Layer w8: v2(481.19,489.45) 535.86,489.45 574.35,527.94 574.35,798.69 642.61,866.95 946.92,866.95 1015.94,935.97 1015.94,1207.16 1027.13,1218.35 v2(1070.33,1218.35)
CC2: P6.31 R7.1 R17.2 U3.68 | length 3269
  Top Layer w7: P6.31@777.95,2308.21 826.24,2259.92 826.24,2101.55 1010.13,1917.66 1010.13,1266.46 1045.38,1231.21 v2(1045.38,1193.48) 1047.43,1191.43 1047.43,1180.65 1172.55,1055.52 1441.09,1055.52 1554.93,1169.37 U3.68@1554.93,1206.9
  Top Layer w8: R7.1@422.56,396.87 428.71,390.72 428.71,378.48 435.07,372.12 449.69,372.12 456.02,365.79 R17.2@456.02,349.87 475.77,349.87 480.45,354.56 v2(480.45,356.92)
  Bottom Layer w8: v2(480.45,356.92) 550.51,356.92 600.42,406.83 600.42,784.22 663.09,846.9 963.6,846.9 1045.38,928.68 v2(1045.38,1193.48)
EN#: R39.2 U7.13 | length 155.9
  Top Layer w8: U7.13@1874.76,2933.44 1874.76,2961.95 1884.38,2971.57 1959.94,2971.57 1964.62,2966.88 R39.2@1964.62,2935.24
FB: C4.2 R3.1 R5.2 U1.4 | length 149.3
  Top Layer w10: U1.4@880.84,285.73 880.92,285.66 880.92,137.62 C4.2@881.74,136.81
GND: C1.1 C2.1 C8.1 C9.1 C10.1 C11.1 C14.2 C15.2 C16.1 C17.2 C18.2 C19.2 C20.2 C21.2 C22.2 C23.2 C24.2 C25.2 C32.1 C33.1 C35.2 C36.2 C51.2 P1.0 P1.4 P1.7 P2.0 P2.A1 P2.B1 P3.5 P3.6 P4.4 P5.36 P5.37 P5.38 P6.33 P6.34 P6.35 P6.36 P6.37 P6.38 P7.2 P9.17 P9.18 R1.2 R2.2 R5.1 R6.2 R7.2 R13.1 R26.1 R39.1 U1.0 U1.5 U2.2 U3.0 U7.14 Y1.2 Y1.4 | length 11579.6
  Top Layer w7: U3.0@1539.19,1382.09 U3.0@1602.18,1445.09 ; v1(1865.08,1448.43) 1865.08,1450.48 C21.2@1865.08,1466.13
  Top Layer w8: U3.0@1602.18,1445.09 U3.0@1653.8,1445.09
  Top Layer w10: U1.5@900.53,285.73 900.53,260.75 908.39,252.89 908.39,242.61 R5.1@915.2,235.8 ; U7.14@1849.76,2933.44 v2(1849.76,2971.93) 1867.01,2989.19 1976.37,2989.19 v2(1988.6,2976.96) 2000.83,2964.72 v2(2000.83,2938.22) 2000.83,2911.71 1990.89,2901.77 R39.1@1964.62,2901.77
  Top Layer w20: P2.0@104.28,252.8 P2.0@268.85,252.8 333.95,252.8 346.96,265.81 346.96,282.38 335.25,294.1 308.85,294.1 P2.B1@307.04,295.91 ; P2.0@104.28,592.96 P2.0@268.85,592.96 295.74,592.96 307.94,580.76 316.1,580.76 316.1,551.66 314.29,549.85 P2.A1@307.04,549.85 ; 175.65,2299.6 179.95,2303.91 673.65,2303.91 P6.33@677.95,2308.21 P6.34@677.95,2208.21 P6.36@577.95,2208.21 P6.38@477.95,2208.21 477.95,2054.72 471.34,2048.11 471.34,1984.73 471.34,1956.77 ; 308.69,668.06 314.92,674.29 R1.2@404.38,674.29 ; C11.1@338.71,1054.93 377.04,1054.93 399.72,1032.25 C10.1@400.71,1032.25 401.19,1032.72 v2@493.84,1032.72 ; R7.2@456.02,396.87 R6.2@456.02,442.89 ; R6.2@456.02,443.87 R6.2@456.02,442.89 ; R13.1@471.34,1863.32 471.34,1874.46 471.34,1956.77 ; v2(482.07,457.99) 482.07,444 477.19,439.12 465.85,439.12 463.9,441.07 457.83,441.07 R6.2@456.02,442.89 ; v1@500.13,714.82 C8.1@500.13,849.96 ; v1(501.32,714.82) 501.32,684.19 513.04,672.47 650.14,672.47 661.86,684.19 v2(661.86,775.18) 694.37,775.18 694.37,1272.14 v2(677.66,1288.85) ; U2.2@505.55,1077.88 505.55,1044.44 v2@493.84,1032.72 ; v2(530.24,1991.8) 495.2,1956.77 471.34,1956.77 ; R2.2@594.88,926.73 v2(594.88,1032.72) ; C9.1@624.31,1099.16 624.31,1044.44 612.59,1032.72 v2(594.88,1032.72) ; v2(836,770.43) 834.34,772.1 P3.5@834.34,1061.66 P3.6@934.34,1061.66 ; U1.0@885.94,325.3 863.51,347.74 U1.0@861.16,347.74 920.2,347.74 921.4,348.94 948.46,348.94 951.68,345.71 v2(1000.96,345.71) ; 985.2,237.88 v2(1000.96,253.65) C33.1@1000.96,296.9 v2(1000.96,345.71) ; C32.1@1000.96,414.14 v2(1000.96,345.71) ; v2@1381.35,1677.21 1384.21,1674.35 C16.1@1384.21,1645.48 ; v2@1675.79,2574.53 1678.57,2577.3 C51.2@1678.57,2593.76 ; C24.2@1787.67,1033.67 1787.67,1010.78 1799.42,999.03 ; C35.2@1835.08,1420.48 v1@1865.08,1450.48 ; v2(1843.24,1131.23) 1845.25,1133.24 Y1.4@1908.41,1133.24 ; v2(1880.5,1236.18) 1885.03,1231.65 C25.2@1914.27,1231.65 ; v2(1896.94,1467.49) v2@1895.58,1466.13 ; v2(1898.03,1512.04) 1897.93,1511.94 C20.2@1865.08,1511.94 C21.2@1865.08,1466.13 v2@1895.58,1466.13 ; 1915.46,1466.13 v2@1895.58,1466.13 ; 1915.46,1469.66 2016.99,1469.66 2029.23,1457.43 R26.1@2029.23,1420.48 ; C36.2@1923.9,1420.48 1923.9,1471.23 1926.31,1473.64 ; Y1.2@1998.96,1058.44 1998.96,1022.5 v2(2001.77,1019.69) ; v2@493.84,1032.72 v2(594.88,1032.72) ; v2@1728.15,1125.43 v2(1707.6,1104.89) 1706.89,1105.6 1706.89,1125.43 v2@1728.15,1125.43 ; v2@1728.15,1125.43 1731.18,1125.43 1731.23,1125.48 1728.2,1125.48 v2@1728.15,1125.43
  Layer 1 w20: 1016.61,647.26 1055.7,686.36 1634.25,686.36 ; P1.7@1640.96,611.85 1645.96,616.85 1645.96,674.64 1634.25,686.36 ; P1.4@1778.76,552.8 1778.76,479.13 1790.47,467.41 1892.98,467.41 P1.0@1899.62,474.05 1899.62,672.28 1885.55,686.36 1634.25,686.36
  Bottom Layer w20: v2(530.24,1991.8) 524.48,1986.04 524.48,1818 536.19,1806.28 699.56,1806.28 ; v2(661.86,775.18) 831.25,775.18 v2(836,770.43) ; v2(677.66,1288.85) 690.42,1301.6 690.42,1543.72 703.18,1556.48 ; P4.4@834.34,1556.48 703.18,1556.48 ; C14.2@1371.5,1223.72 1489.96,1223.72 1504.25,1238.01 v4(1504.25,1347.09) ; P1.0@1382.3,474.05 1511.79,474.05 ; v1(1474.5,1499.06) 1474.5,1584.06 1302.08,1756.48 P7.2@934.34,1756.48 934.34,1766.76 894.82,1806.28 699.56,1806.28 ; C17.2@1578.83,1239.93 C18.2@1629.73,1239.93 C18.2@1630.71,1239.93 ; U3.0@1637.61,1283.67 1637.61,1246.83 C18.2@1630.71,1239.93 ; C23.2@1696.65,1542.33 1696.65,1253.67 1682.91,1239.93 ; 1757.72,474.05 P1.0@1899.62,474.05 P1.0@1909.8,463.88 ; P5.36@2398.45,1851.84 P5.38@2398.45,1951.84 ; P5.37@2498.45,1951.84 P5.38@2398.45,1951.84 ; 699.56,1806.28 703.18,1802.67 703.18,1556.48 ; C18.2@1630.71,1239.93 1682.91,1239.93 ; 1682.91,1239.93 1877.56,1239.93 1931.75,1185.74 2046.81,1185.74 2180.92,1319.84 v2(2180.92,1936.77) 2195.98,1951.84 P5.38@2398.45,1951.84
  other v1: 73.76,27.42 172.18,27.42 270.61,27.42 369.03,27.42 467.46,27.42 565.88,27.42 664.31,27.42 762.73,27.42 861.16,27.42 959.58,27.42 1058.01,27.42 1156.43,27.42 1254.86,27.42 1353.28,27.42 1451.71,27.42 1550.14,27.42 1648.56,27.42 1746.99,27.42 1845.41,27.42 1943.84,27.42 2042.26,27.42 2140.69,27.42 2239.11,27.42 2337.54,27.42 2435.96,27.42 2534.39,27.42 2632.81,27.42 878.06,81.79 931.25,81.28 1016.67,84.35 1088.79,106.85 122.97,125.84 221.4,125.84 319.82,125.84 418.25,125.84 516.67,125.84 615.1,125.84 713.52,125.84 1599.35,125.84 1697.77,125.84 1796.2,125.84 1894.62,125.84 1993.05,125.84 2091.47,125.84 2189.9,125.84 2288.32,125.84 2583.6,125.84 2682.02,125.84 838.59,197.63 962.44,201.37 172.18,224.27 369.03,224.27 467.46,224.27 565.88,224.27 664.31,224.27 1648.56,224.27 1746.99,224.27 1845.41,224.27 1943.84,224.27 2140.69,224.27 2239.11,224.27 2632.81,224.27 984.2,227.87 845.51,237.21 968.13,257.96 766.43,305.71 1588.63,315.15 122.97,322.69 1304.07,322.69 1402.5,322.69 1697.77,322.69 1796.2,322.69 1894.62,322.69 1993.05,322.69 2189.9,322.69 2583.6,322.69 2682.02,322.69 766.85,336.73 829.47,369.96 481.54,399.75 73.76,421.12 172.18,421.12 369.03,421.12 1254.86,421.12 1746.99,421.12 2042.26,421.12 2632.81,421.12 481.54,431.14 122.97,519.54 1205.65,519.54 1993.05,519.54 2583.6,519.54 2682.02,519.54 172.18,617.97 1254.86,617.97 1353.28,617.97 1943.84,617.97 2632.81,617.97 339.68,667.59 122.97,716.39 221.4,716.39 319.82,716.39 648.47,716.39 1697.77,716.39 1796.2,716.39 1894.62,716.39 2583.6,716.39 2682.02,716.39 500.62,799.61 73.76,814.82 172.18,814.82 270.61,814.82 2534.39,814.82 2632.81,814.82 2583.6,913.24 2682.02,913.24 73.76,1011.67 1889.05,1011.79 2534.39,1011.67 2632.81,1011.67 2039.41,1012.55 1933.81,1013.57 1720.69,1036.27 2048.44,1056.91 2048.44,1094.91 1731.11,1096.66 122.97,1110.09 2583.6,1110.09 2682.02,1110.09 2048.19,1142.51 1952.99,1167.02 1849.98,1172.71 73.76,1208.52 2632.81,1208.52 1845.52,1234.2 1532.14,1257.35 1608.87,1260.13 1468.14,1261.33 122.97,1306.94 221.4,1306.94 418.25,1306.94 516.67,1306.94 615.1,1306.94 713.52,1306.94 2583.6,1306.94 2682.02,1306.94 1562.92,1310.23 1657.37,1310.23 1440.78,1313.16 1607.28,1313.41 1469.73,1316.59 1532.94,1319.37 1468.93,1369.86 1618.81,1376.22 1662.52,1379.73 1506.22,1382.09 1582.24,1382.18 1434.74,1386.16 73.76,1405.37 172.18,1405.37 2534.39,1405.37 2632.81,1405.37 1473.49,1406.57 1533.65,1421.03 1606.33,1421.61 1946.55,1430.6 1653.8,1443.41 1433.95,1451.36 1478.47,1451.76 1517.44,1451.76 1556.79,1452.95 1603.31,1453.74 1536.92,1497.87 1603.7,1497.87 122.97,1503.79 221.4,1503.79 418.25,1503.79 713.52,1503.79 910.37,1503.79 2583.6,1503.79 2682.02,1503.79 73.76,1602.22 172.18,1602.22 762.73,1602.22 959.58,1602.22 2534.39,1602.22 2632.81,1602.22 1362.28,1683.88 122.97,1700.64 221.4,1700.64 615.1,1700.64 713.52,1700.64 910.37,1700.64 2682.02,1700.64 1381.06,1702.41 1382.6,1726.74 73.76,1799.07 565.88,1799.07 664.31,1799.07 762.73,1799.07 861.16,1799.07 2632.81,1799.07 122.97,1897.49 221.4,1897.49 2189.9,1897.49 2583.6,1897.49 2682.02,1897.49 2106.12,1898.47 2195.06,1987.98 73.76,1995.92 664.31,1995.92 762.73,1995.92 861.16,1995.92 2632.81,1995.92 122.97,2094.35 221.4,2094.35 319.82,2094.35 418.25,2094.35 516.67,2094.35 615.1,2094.35 713.52,2094.35 1599.35,2094.35 1697.77,2094.35 1796.2,2094.35 2386.75,2094.35 2485.17,2094.35 2583.6,2094.35 2682.02,2094.35 73.76,2192.77 172.18,2192.77 270.61,2192.77 369.03,2192.77 2534.39,2192.77 2632.81,2192.77 122.97,2291.2 319.82,2291.2 418.25,2291.2 2386.75,2291.2 2485.17,2291.2 2583.6,2291.2 2682.02,2291.2 1258.9,2361.8 1362.78,2365.85 1451.71,2365.85 1550.14,2365.85 73.76,2389.62 172.18,2389.62 270.61,2389.62 369.03,2389.62 467.46,2389.62 565.88,2389.62 664.31,2389.62 762.73,2389.62 861.16,2389.62 959.58,2389.62 1058.01,2389.62 1845.41,2389.62 1943.84,2389.62 2042.26,2389.62 2140.69,2389.62 2239.11,2389.62 2337.54,2389.62 2534.39,2389.62 2632.81,2389.62 1402.5,2471.55 1500.92,2471.55 1599.35,2471.55 122.97,2488.05 221.4,2488.05 319.82,2488.05 418.25,2488.05 516.67,2488.05 615.1,2488.05 713.52,2488.05 811.95,2488.05 910.37,2488.05 1894.62,2488.05 1993.05,2488.05 2091.47,2488.05 2189.9,2488.05 2288.32,2488.05 2386.75,2488.05 2485.17,2488.05 2583.6,2488.05 2682.02,2488.05
  other v2: 819.48,112.65 838.6,165.05 802.91,180.76 696.28,227.52 729.74,227.41 728.14,272.74 943.58,276.07 676.96,295.12 704.42,295.78 945.35,307.13 737.29,315.43 681.06,321.26 828.85,324.07 856.7,324.07 885.94,324.07 911.06,324.07 945.57,332.11 979.75,332.11 739.32,343.89 828.28,348.45 866.36,348.45 894.31,348.45 921.4,348.45 947.16,359.13 1023.46,363.11 974.58,365.49 740.33,368.95 913.27,369.13 886.93,370.85 858.31,371.2 944.77,386.56 941.99,414.38 958.01,444.56 992.01,460.27 965.69,477.62 1447.21,697.22 1378.95,698.81 1668.55,701.63 1330.58,737.64 1660.42,740.37 1601.75,757.35 917.87,773.13 1401.79,778 960.86,786.07 858.9,793.58 903.7,793.58 1321.32,804.18 1387.29,815.76 1264.34,841.94 1315.89,858.11 1396.8,858.11 1454.3,871.95 1265.27,885.56 1315.89,897.25 1396.8,897.25 593.71,975.67 1816.42,999.03 596.48,1002.23 428.02,1031.97 457.85,1032.4 544.36,1032.72 571.58,1037.38 499.69,1038.58 403.67,1062.4 594.82,1067.54 380.6,1077.62 592.88,1094.38 380.09,1106.27 1722.23,1125.48 693.64,1247.39 693.44,1270.42 2021.65,1460.58 1995.08,1479.88 1869.78,1489.11 1928.5,1512.74 1386.35,1674.21 2410.1,2213.02 2404.02,2339.44 2404.69,2394.87 1760.05,2430.86 1128.58,2441.97 1826.45,2497.58 2549.18,2502.83 2410.78,2511.83 2493.79,2533.55 1249.86,2535.87 1898.76,2549.69 1041.88,2552.85 2281.54,2560.08 2199.15,2562.88 2412.81,2574.7 2554.77,2574.98 1673.79,2575.53 1737.81,2578.42 906.99,2583.88 538.35,2584.96 799.96,2587.12 2492.86,2591.73 695.1,2593.61 308.29,2610.69 2418.85,2611.28 1896.15,2615.16 2150.22,2633.06 2231.48,2632.4 2561.75,2648.99 2119.42,2661.24 1737.44,2664.18 1786.55,2670.84 1837.62,2670.84 1890.94,2671.18 2412.34,2672.72 2484.48,2685.29 149.7,2700.19 2112.86,2704.49 2070.27,2721.53 259.61,2741.01 1481.02,2742.79 68.05,2755.15 2028.7,2759.74 1658.25,2768.81 1704.09,2769.63 1628.38,2791.12 1948.16,2791.12 2110.9,2793.61 1705.96,2795.27 1791.82,2795.86 1873.55,2795.86 2494.44,2800.26 1645.15,2811.38 2080.75,2815.24 1582.1,2822.03 1491.83,2827.12 1686.08,2830.21 2010.34,2833.17 1755.67,2833.49 1831,2835.12 1882.58,2835.94 2114.83,2841.45 1923.88,2853.9 1692.93,2867.02 1774.76,2867.02 1612.42,2869.66 2208.54,2872.25 138.71,2876.05 1569.52,2875.6 1851.46,2875.24 2150.22,2875.53 2080.1,2878.81 878.62,2879.31 331.84,2883.9 2008.57,2891.8 234.49,2893.32 1110.22,2900.63 477.94,2905.97 2395.46,2906.77 1544.45,2907.28 998.88,2911.44 1437.78,2913.6 1238.87,2914.68 1341.57,2916.84 1920.92,2927.92 2078.79,2943.68 484.9,2955.29 2299.71,2956.26 1540.49,2960.07 965.47,2964.12 1179.03,2966.16 2100.4,2967.51 1328.21,2969.23 1412,2971.27 1483.73,2976.57 383.65,2993.81 226.64,3001.66 2055.19,3005.94 1796.6,3019.35 2210.42,3035.87 1822.29,3040.98 2012.5,3045.49 1882.69,3047.29 538.87,3048.71 1948.05,3049.09 481,3094.3 593.99,3100.93 2050.12,3102.57 1786.95,3106.14 1871.54,3109.02 182.67,3119.42 336.55,3124.13 597.19,3149.25 1735.44,3152.13 650.93,3182.74 1203.87,3197.19 1653.59,3197.19 749.56,3198.89 900.1,3198.89 1393.14,3199.66 1531.34,3199.66 1286.93,3200.23 1040.16,3201.79
  other v3: 1508.57,1283.67 1574.18,1283.67 1440.76,1347.1 1637.61,1347.1 1440.76,1412.71 1637.61,1412.71 1508.57,1480.52 1574.18,1480.52
  other v4: 1574.12,1347.09 1504.25,1417.09 1574.12,1417.09
KEY: P4.3 S2.1 | length 735.2
  Top Layer w10: S2.1@175.65,1476.46 177.94,1474.17 563.29,1474.17 745.61,1656.48 P4.3@834.34,1656.48
LED1: D2.2 P4.1 | length 387.4
  Top Layer w10: D2.2@486.68,1760.53 584.62,1760.53 680.57,1856.48 P4.1@834.34,1856.48
LED2: D3.2 P4.2 | length 405.7
  Top Layer w10: D3.2@486.68,1616.37 574.89,1616.37 715,1756.48 P4.2@834.34,1756.48
NetC3_1: C3.1 U1.6 | length 59.3
  Top Layer w10: U1.6@900.53,409.75 900.53,433.48 910.17,443.12 910.17,455.38 C3.1@916.98,462.19
NetC3_2: C3.2 L1.1 U1.7 U1.8
NetC7_2: C7.2 R2.1 R4.2 U2.6 | length 160
  Top Layer w15: U2.6@542.95,983.39 542.95,946.18 561.41,927.72 R2.1@561.41,926.73 R4.2@561.41,830.99
NetC12_1: C12.1 P1.8 | length 173.8
  Top Layer w5: C12.1@1545.85,761.86 1544.87,761.86 1527.85,744.85 1527.85,643.71 1559.71,611.85 P1.8@1562.22,611.85
NetC13_1: C13.1 P1.9 | length 173.8
  Top Layer w5: P1.9@1483.48,611.85 1485.99,611.85 1517.85,643.71 1517.85,744.85 1500.84,761.86 C13.1@1499.85,761.86
NetD1_2: D1.2 R1.1 | length 71.8
  Top Layer w20: R1.1@437.9,674.34 D1.2@437.9,746.15
NetD2_1: D2.1 R11.2 | length 71.7
  Top Layer w20: D2.1@426.05,1760.53 426.05,1733.36 437.88,1721.53 R11.2@437.88,1693.78
NetD3_1: D3.1 R12.2 | length 75.7
  Top Layer w20: D3.1@426.05,1616.37 426.05,1586.68 437.88,1574.84 R12.2@437.88,1545.55
NetF1_2: F1.2 S1.1 | length 326.7
  Top Layer w30: S1.1@174.75,1068.18 218.64,1068.18 343.66,1193.2 F1.2@343.66,1299.16
NetL2_1: L2.1 U2.3 | length 118.5
  Top Layer w20: U2.3@468.15,1077.88 469.96,1079.69 L2.1@469.96,1195.67
NetP2_A5: P2.A5 R16.1 | length 123.3
  Top Layer w8: P2.A5@307.04,472.09 367.84,472.09 386.62,490.87 R16.1@422.56,490.87
NetP2_B5: P2.B5 R17.1 | length 118.2
  Top Layer w8: P2.B5@307.04,353.98 R17.1@425.27,353.98
NetR13_2: R13.2 S2.2 | length 292
  Top Layer w10: S2.2@175.65,1791.42 247.56,1863.32 R13.2@437.88,1863.32
PA0: P5.20 U3.18 | length 1019.2
  Top Layer w7: U3.18@1714.38,1508.08 1739.07,1508.08 1786.47,1555.47 2005.51,1555.47 2279.8,1281.18 2279.8,1098.76 2326.72,1051.84 P5.20@2398.45,1051.84
PA1: P5.21 U3.19 | length 1099.4
  Top Layer w7: U3.19@1714.38,1523.83 1733.32,1523.83 1779.63,1570.14 2012.73,1570.14 2294.75,1288.11 2294.75,1157.13 2355.82,1096.06 2442.67,1096.06 P5.21@2498.45,1151.84
PA2: P5.22 U3.20 | length 987.7
  Top Layer w7: U3.20@1680.92,1557.29 1680.92,1576.64 1687.64,1583.36 2022.97,1583.36 2308.63,1297.7 2308.63,1179.37 2336.16,1151.84 P5.22@2398.45,1151.84
PA3: P10.2 U3.21 | length 1895.8
  Top Layer w7: U3.21@1665.17,1557.29 1665.17,1586.69 1683.77,1605.3 v2(1843.44,1605.3)
  Bottom Layer w7: v2(1843.44,1605.3) 1843.44,1716.18 1843.44,1727.52 1850.55,1734.64 1879.45,1734.64 2260.53,2115.72 2376.28,2115.72 2454.14,2193.58 2454.14,2712.16 2411.05,2755.25 2281.79,2755.25 2277.69,2759.35 P10.2@2277.69,2799.25
PA4: P5.23 U3.22 | length 1142.4
  Top Layer w7: U3.22@1649.42,1557.29 1649.42,1591.27 1688.88,1630.72 2017.46,1630.72 2326.99,1321.19 2326.99,1242.83 2366.47,1203.34 2449.95,1203.34 P5.23@2498.45,1251.84